# Altium PCB PCB_RC-Car_2024-02-15.pcbdoc
Units mil, origin at the board's own origin, x right, y up, seen from the top; angles counter-clockwise.
Board outline 5135.43 x 2790 mil, 2 copper layers (Top Layer, Bottom Layer); 70 components, 43 nets, 222 pads, 110 vias.
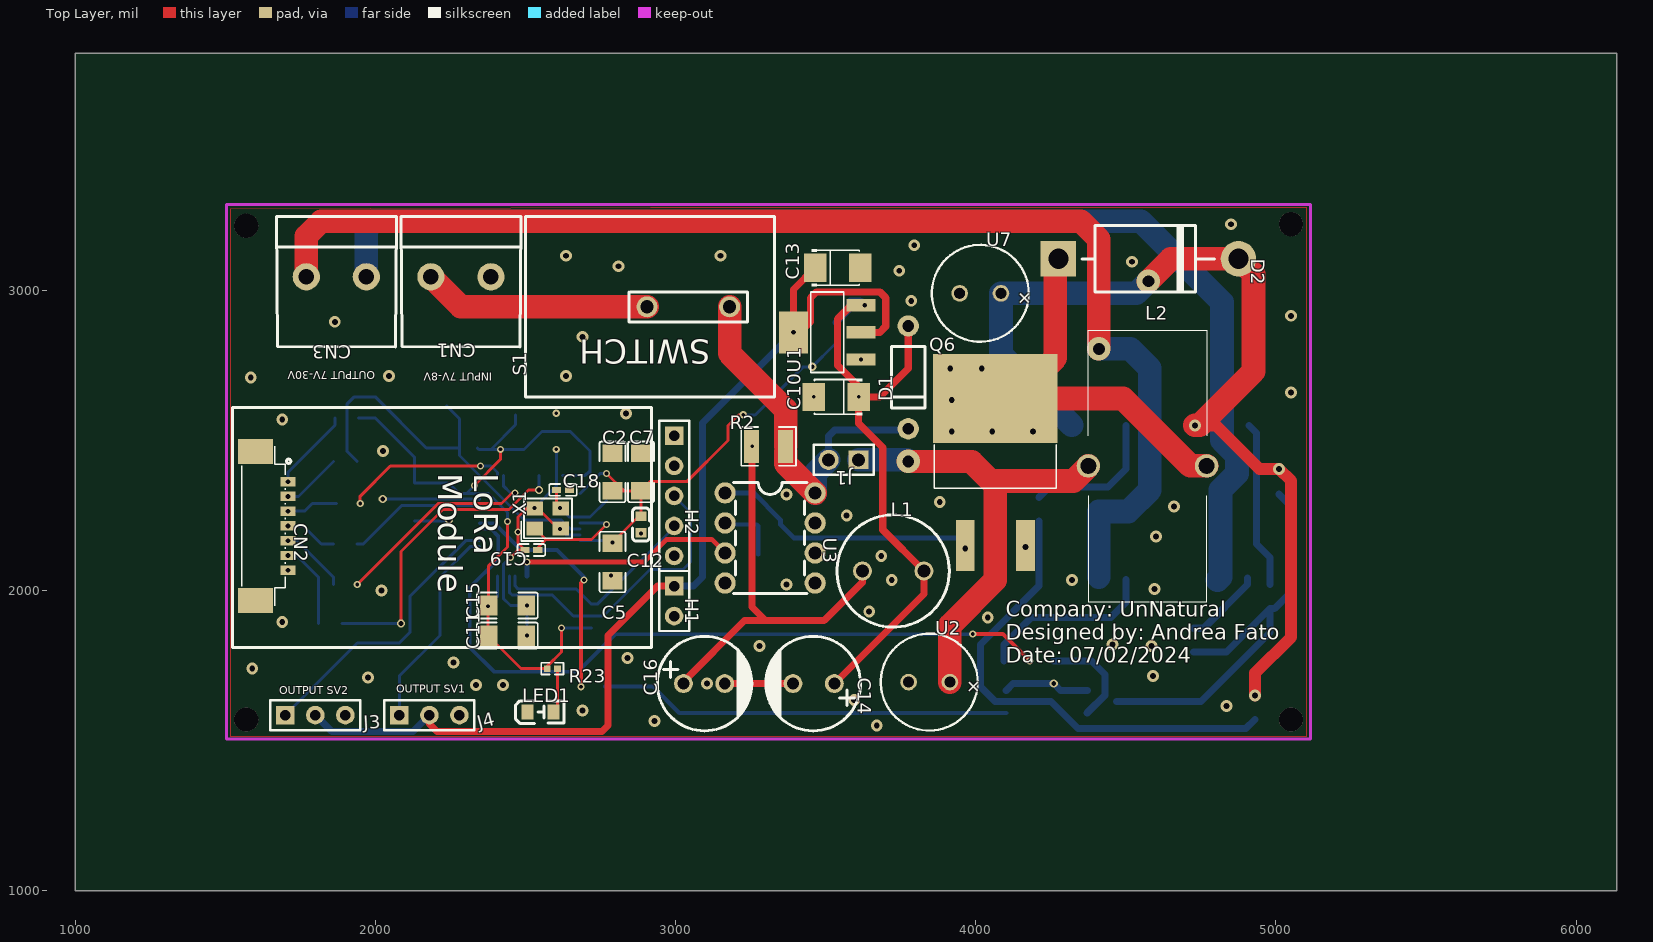
[diagram p0: Top Layer view]
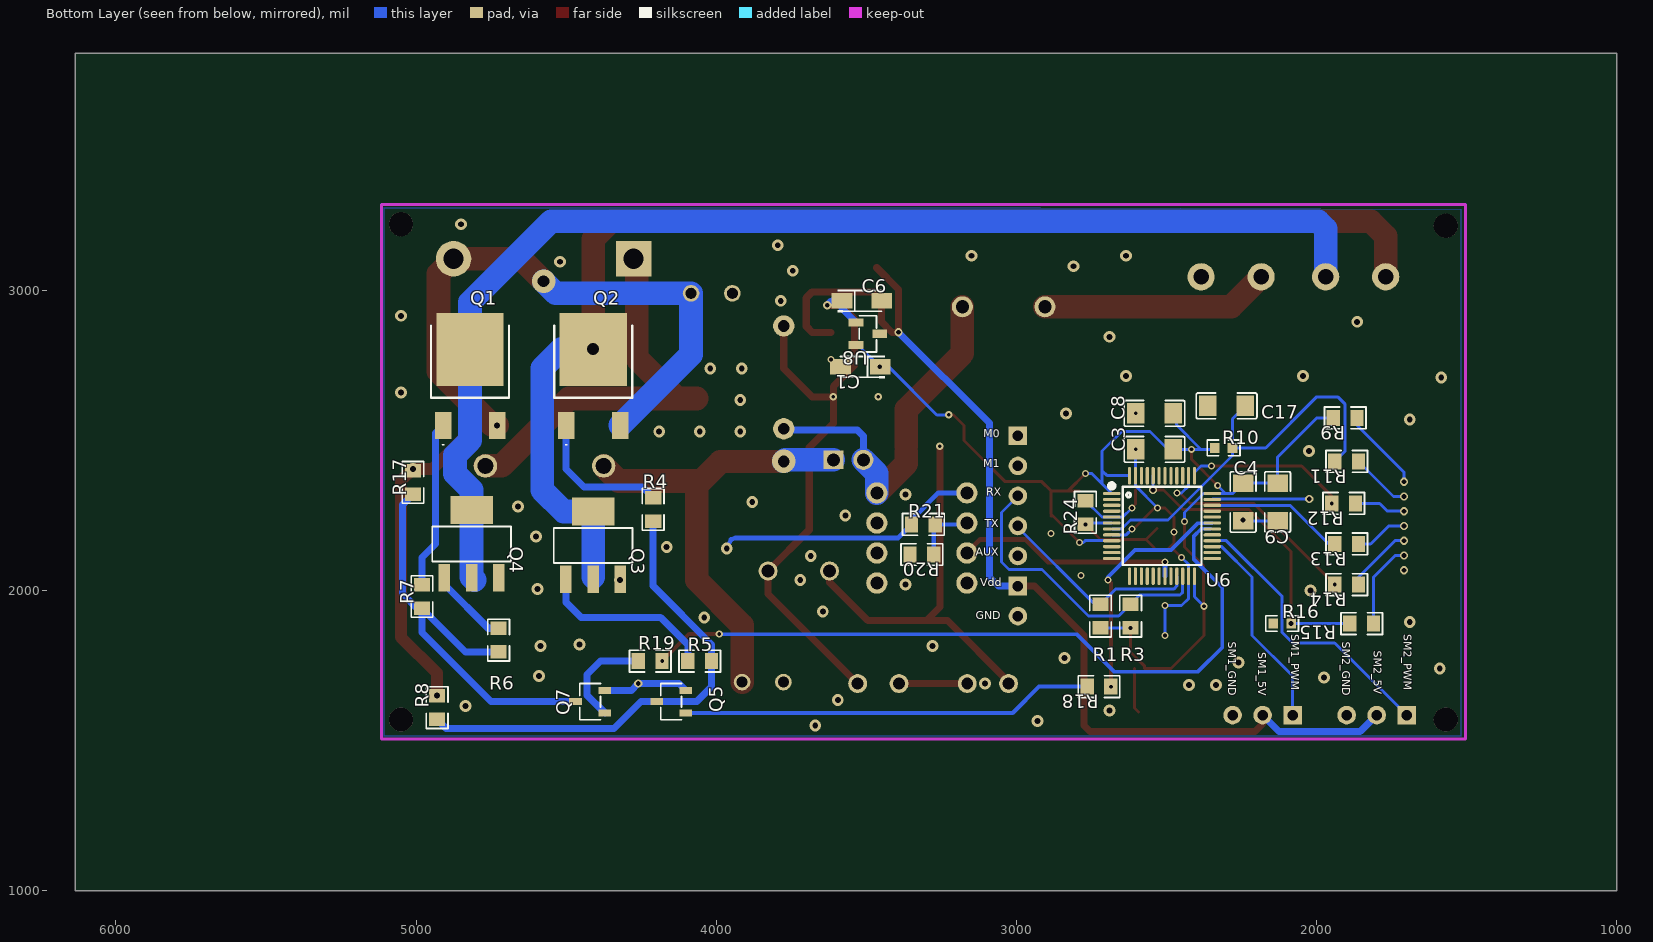
[diagram p1: Bottom Layer view, seen from below]

## Layer stack, top to bottom
Top Layer: signal copper (thickness not stored)
Dielectric: dielectric 12.6, FR-4, Dk 4.8
Bottom Layer: signal copper (thickness not stored)

## Board outline
6135.43,1000 1000,1000 1000,3790 6135.43,3790

## Components (designator, comment, footprint, x,y, rotation, side; value= is the part's Value field where it differs from the comment)
C1 "10uF" CAP-SMD_L3.2-W1.6-RD-C7171 3520,2745 r180 bottom
C2 "100nF" C1206#1 2790,2395 r270 top
C3 "100nF" C1206#2 2540,2470 r0 bottom
C4 "100nF" C1206#2 2245,2295 r270 bottom
C5 "100nF" C1206#1 2790,2095 r90 top
C6 "10uF" CAP-SMD_L3.2-W1.6-RD-C7171 3515,2965 r0 bottom
C7 "4.7uF" C1206#1 2885,2395 r90 top
C8 "4.7uF" C1206#2 2540,2590 r180 bottom
C9 "4.7uF" C1206#2 2130,2295 r90 bottom
C10 "22uF" CAP-SMD_L3.5-W2.8-R-RD 3535,2645 r0 top
C11 "4.7uF" C1206#1 2440,1850 r0 top
C12 "10uF" C0603 2885,2220 r90 top
C13 "22uF" CAP-SMD_L3.5-W2.8-R-RD 3540,3075 r180 top
C14 "470uF" CAP-TH_BD8.0-P3.50-D0.6-FD 3460,1690 r180 top
C15 "100nF" C1206#1 2440,1950 r180 top
C16 "470uF" CAP-TH_BD8.0-P3.50-D0.6-FD 3095,1690 r0 top
C17 "100nF" C1206#2 2300,2615 r0 bottom
C18 "13pF" C0402 2625,2335 r0 top
C19 "13pF" C0402 2520,2135 r0 top
CN1 "1711725" CONN-TH_MKDS3-2-5.08 2285,3045 r180 top
CN2 "53398-0771" CONN-SMD_7P-P1.25_53398-0771 1655,2215 r270 top
CN3 "MKDS3/2-5.08" CONN-TH_MKDS3-2-5.08 1870,3045 r180 top
D1 "1N4005-T" DO-41_BD2.4-L4.7-P8.70-D0.9-RD 3775,2710 r90 top
D2 "SB1240-3G" DO-201AD 4575,3105 r270 top
H1 "HDR-F-2.54_1x2" HDR-F-2.54_1X2 2995,1965 r270 top
H2 "HDR-F-2.54_1x5" HDR-F-2.54_1X5 2995,2315 r270 top
J1 "HDR-M-2.54_1x2" HDR-M-2.54_1X2 3560,2435 r180 top
J3 "HDR-M-2.54_1x3" HDR-M-2.54_1X3 1800,1585 r0 top
J4 "HDR-M-2.54_1x3" HDR-M-2.54_1X3 2180,1585 r0 top
L1 "2.2mH" IND-TH_BD9.5-P5.20-D0.6 3725,2065 r0 top
L2 "2mH" DENO230001 4375,2415 r0 top
LED1 "BL-HGK35A-AV-TRB" LED0805-RD_GREEN 2550,1595 r0 top
Q1 "TSM7P06CP_ROG" TSM7P06CPROG 4820,2715 r0 bottom
Q2 "TSM7P06CP_ROG" TSM7P06CPROG 4410,2715 r0 bottom
Q3 "TSM950N10CW RPG" SOT-223-3_L6.7-W3.7-P2.30-LS7.0-BR 4410,2150 r90 bottom
Q4 "TSM950N10CW RPG" SOT-223-3_L6.7-W3.7-P2.30-LS7.0-BR 4815,2155 r90 bottom
Q5 "NSS40201LT1G" SOT-23-3_L2.9-W1.6-P1.90-LS2.8-BR 4150.01,1630 r0 bottom
Q6 "AUIRF1010ZSTRL" D2PAK_L10.0-W9.0-P2.54-LS15.0-BR 4065,2395 r270 top
Q7 "NSS40201LT1G" SOT-23-3_L2.9-W1.6-P1.90-LS2.8-BR 4420.01,1630 r0 bottom
R1 "4.7k" R0805 2720,1915 r270 bottom
R2 "10Ω" R1210 3310,2480 r180 top
R3 "4.7k" R0805 2620,1915 r270 bottom
R4 "10k" R0805 4210,2270 r270 bottom
R5 "10k" R0805 4055,1765 r180 bottom
R6 "10k" R0805 4725,1835 r90 bottom
R7 "10k" R0805 4980,1980 r90 bottom
R8 "5k" R0805 4930,1610 r270 bottom
R9 "22Ω" R0805 1905,2575 r180 bottom
R10 "100kΩ" R0603 2310,2475 r0 bottom
R11 "22Ω" R0805 1900,2430 r180 bottom
R12 "22Ω" R0805 1910,2290 r180 bottom
R13 "22Ω" R0805 1900,2155 r180 bottom
R14 "22Ω" R0805 1900,2020 r180 bottom
R15 "22Ω" R0805 1850,1890 r180 bottom
R16 "10kΩ" R0603 2115,1890 r0 bottom
R17 "5k" R0805 5010,2360 r270 bottom
R18 "5k" R0805 2725,1680 r180 bottom
R19 "5k" R0805 4220,1765 r0 bottom
R20 "10k" R0805 3315,2120 r0 bottom
R21 "10k" R0805 3310,2220 r180 bottom
R23 "80.6Ω" R0402 2590,1740 r180 top
R24 "1MΩ(DNP)" R0805 2770,2260 r270 bottom
S1 "RA1113112R" SWITCH-2PIN 2855,2945 r180 top
U1 "AZ1117CH-5.0TRG1" SOT-223_L6.5-W3.5-P2.30-LS7.0-BR 3505,2860 r0 top
U2 "100uF" WCAP-PTG5_8X11.5(DXL) 3845,1695 r0 top
U3 "LMC662CN" PDIP-8_L9.3-W6.4-P2.54-LS7.6-BL 3315,2175 r270 top
U6 "STM32F030CCT6" LQFP-48_L7.0-W7.0-P0.50-LS9.0-BL 2515,2215 r90 bottom
U7 "100uF" WCAP-PTG5_8X11.5(DXL) 4015,2990 r0 top
U8 "AP7381-33SA-7" SOT-23-3_L2.9-W1.3-P1.90-LS2.4-BR 3495,2855 r180 bottom
X1 "16MHz" CRYSTAL-SMD_4P-L3.2-W2.5-BL 2575,2240 r0 top

## Footprints (in the part's own frame and the unit in brackets; to place one, negate y for a bottom-side part, rotate by r counter-clockwise, add the part's x,y. Pads: shape width x height; smd on the part's side, far side on the other; paste and mask are expansions set on the pad)
C0402 [mm]
  rect 0.79x0.54 smd paste-100 mask+0.051: 1(-0.545,0) 2(0.545,0)
  silkscreen extent -1.17,-0.5 1.17,0.5
C0603 [mm]
  rect 0.8x0.9 smd paste+0 mask+0.051: 1(-0.7,0) 2(0.7,0)
  silkscreen extent -1.41,-0.71 1.39,0.72
C1206#1 [mm]
  rect 1.485x1.728 smd paste-100 mask+0.051: 1(-1.593,0) 2(1.593,0)
  silkscreen extent -2.56,-1.09 2.56,1.09
C1206#2 [mm]
  rect 1.485x1.728 smd paste-100 mask+0.051: 1(1.593,0) 2(-1.593,0)
  silkscreen extent -2.56,-1.09 2.56,1.09
CAP-SMD_L3.2-W1.6-RD-C7171 [mil]
  rect 69.19x51.02 smd paste+0 mask+2: 1(66.39,0) 2(-66.39,0)
  silkscreen extent -66,-37 81,37
CAP-SMD_L3.5-W2.8-R-RD [mm]
  rect 1.9x2.376 smd paste+0 mask+0.051: 1(1.899,0) 2(-1.899,0)
  silkscreen extent -1.83,-1.55 2.21,1.55
CAP-TH_BD8.0-P3.50-D0.6-FD [mm]
  round 1.6 hole 1 paste+0 mask+0.051: 1(-1.75,0) 2(1.75,0)
  silkscreen extent -3.96,-4 4.04,4
CONN-SMD_7P-P1.25_53398-0771 [mm]
  rect 0.8x1.3 smd paste+0 mask+0.051: 1(-3.75,1.375) 2(-2.5,1.375) 3(-1.25,1.375) 4(0,1.375) 5(1.25,1.375) 6(2.5,1.375) 7(3.75,1.375)
  rect 2.1x3 smd paste+0 mask+0.051: 8(6.3,-1.375) 9(-6.3,-1.375)
  silkscreen extent -6.73,-2.54 6.73,1.61
CONN-TH_MKDS3-2-5.08 [mm]
  round 2.3 hole 1.3 paste+0 mask+0.051: 1(-2.54,0) 2(2.54,0)
  silkscreen extent -5.08,-5.08 5.08,5.96
CRYSTAL-SMD_4P-L3.2-W2.5-BL [mm]
  rect 1.4x1.2 smd paste+0 mask+0.051: 1(-1.1,-0.85) 2(1.1,-0.85) 3(1.1,0.85) 4(-1.1,0.85)
  silkscreen extent -2.26,-1.91 2.03,1.68
D2PAK_L10.0-W9.0-P2.54-LS15.0-BR [mm]
  rect 4.3x1.6 smd paste+0 mask+0.051: 1(6.218,-2.54) 3(6.218,2.54)
  rect 7.532x10.566 smd paste+0 mask+0.051: 2(-6.218,0)
  silkscreen extent -2.3,-5.16 1.37,5.16
DENO230001 [mil]
  round 77.95 hole 51.96 paste+0 mask+2: 1(0,0) 2(393.7,0)
  silkscreen extent 0,-453 394,453
DO-41_BD2.4-L4.7-P8.70-D0.9-RD [mm]
  round 1.8 hole 1 paste+0 mask+0.051: 1(-4.35,0) 2(4.35,0)
  silkscreen extent -2.6,-1.4 2.6,1.4
DO-201AD [mm]
  rect 3x3 hole 1.7 paste+0 mask+0.051: 1(0,-7.62)
  round 3 hole 1.7 paste+0 mask+0.051: 2(0,7.62)
  silkscreen extent -2.8,-5.6 2.8,5.6
HDR-F-2.54_1X2 [mil]
  rect 62x62 hole 35 paste+0 mask+2: 1(-50,0)
  round 62 hole 35 paste+0 mask+2: 2(50,0)
  silkscreen extent -100,-49 100,50
HDR-F-2.54_1X5 [mil]
  rect 62x62 hole 35 paste+0 mask+2: 1(-200,0)
  round 62 hole 35 paste+0 mask+2: 2(-100,0) 3(0,0) 4(100,0) 5(200,0)
  silkscreen extent -250,-50 250,50
HDR-M-2.54_1X2 [mm]
  rect 1.7x1.575 hole 1.1 paste+0 mask+0.051: 1(-1.27,0)
  round 1.7 hole 1.1 paste+0 mask+0.051: 2(1.27,0)
  silkscreen extent -2.54,-1.27 2.54,1.27
HDR-M-2.54_1X3 [mil]
  rect 62x62 hole 35 paste+0 mask+2: 1(-100,0)
  round 62 hole 35 paste+0 mask+2: 2(0,0) 3(100,0)
  silkscreen extent -150,-50 150,50
IND-TH_BD9.5-P5.20-D0.6 [mm]
  round 1.6 hole 1.1 paste+0 mask+0.051: 1(-2.6,0) 2(2.6,0)
  silkscreen extent -4.75,-4.75 4.75,4.75
LED0805-RD_GREEN [mm]
  rect 1x1.25 smd paste+0 mask+0.051: 1(-1.1,0) 2(1.1,0)
  silkscreen extent -2.1,-0.95 1.98,0.96
LQFP-48_L7.0-W7.0-P0.50-LS9.0-BL [mm]
  oval 0.27x1.5 smd paste+0 mask+0.05: 1(2.75,4.25) 2(2.25,4.25) 3(1.75,4.25) 4(1.25,4.25) 5(0.75,4.25) 6(0.25,4.25) 7(-0.25,4.25) 8(-0.75,4.25) 9(-1.25,4.25) 10(-1.75,4.25) 11(-2.25,4.25) 12(-2.75,4.25) 25(-2.75,-4.25) 26(-2.25,-4.25) 27(-1.75,-4.25) 28(-1.25,-4.25) 29(-0.75,-4.25) 30(-0.25,-4.25) 31(0.25,-4.25) 32(0.75,-4.25) 33(1.25,-4.25) 34(1.75,-4.25) 35(2.25,-4.25) 36(2.75,-4.25)
  oval 1.5x0.27 smd paste+0 mask+0.05: 13(-4.25,2.75) 14(-4.25,2.25) 15(-4.25,1.75) 16(-4.25,1.25) 17(-4.25,0.75) 18(-4.25,0.25) 19(-4.25,-0.25) 20(-4.25,-0.75) 21(-4.25,-1.25) 22(-4.25,-1.75) 23(-4.25,-2.25) 24(-4.25,-2.75) 37(4.25,-2.75) 38(4.25,-2.25) 39(4.25,-1.75) 40(4.25,-1.25) 41(4.25,-0.75) 42(4.25,-0.25) 43(4.25,0.25) 44(4.25,0.75) 45(4.25,1.25) 46(4.25,1.75) 47(4.25,2.25) 48(4.25,2.75)
  silkscreen extent -3.3,-3.34 3.59,4.46
PDIP-8_L9.3-W6.4-P2.54-LS7.6-BL [mm]
  round 1.8 hole 1.1 paste+0 mask+0.051: 1(-3.81,-3.81) 2(-1.27,-3.81) 3(1.27,-3.81) 4(3.81,-3.81) 5(3.81,3.81) 6(1.27,3.81) 7(-1.27,3.81) 8(-3.81,3.81)
  silkscreen extent -4.7,-3.11 4.7,3.11
R0402 [mm]
  rect 0.566x0.54 smd paste-100 mask+0.051: 1(-0.433,0) 2(0.433,0)
  silkscreen extent -0.94,-0.5 0.94,0.5
R0603 [mil]
  rect 31.75x34.02 smd paste-3937.01 mask+2: 1(29.66,0) 2(-29.66,0)
  silkscreen extent -55,-26 55,26
R0805 [mil]
  rect 44.59x54.21 smd paste-3937.01 mask+2: 1(39.37,0) 2(-39.37,0)
  silkscreen extent -69,-36 69,36
R1210 [mil]
  rect 50.49x110.55 smd paste-3937.01 mask+2: 1(-56.74,0) 2(56.74,0)
  silkscreen extent -91,-64 91,64
SOT-23-3_L2.9-W1.3-P1.90-LS2.4-BR [mm]
  rect 1.25x0.7 smd paste+0 mask+0.051: 1(-1,0.95) 2(-1,-0.95) 3(1,0)
  silkscreen extent -0.73,-1.53 0.73,1.53
SOT-23-3_L2.9-W1.6-P1.90-LS2.8-BR [mm]
  rect 1.07x0.6 smd paste+0 mask+0.051: 1(-1.235,0.95) 2(-1.235,-0.95) 3(1.235,0)
  silkscreen extent -0.88,-1.54 0.88,1.54
SOT-223-3_L6.7-W3.7-P2.30-LS7.0-BR [mm]
  rect 2.34x0.98 smd paste+0 mask+0.051: 1(-2.87,2.3) 2(-2.87,0) 3(-2.87,-2.3)
  rect 2.34x3.6 smd paste+0 mask+0.051: 4(2.87,0)
  silkscreen extent -1.47,-3.33 1.47,3.33
SOT-223_L6.5-W3.5-P2.30-LS7.0-BR [mm]
  rect 2.465x1.05 smd paste+0 mask+0.051: 1(2.857,-2.3) 2(2.857,0) 3(2.857,2.3)
  rect 2.465x3.54 smd paste+0 mask+0.051: 4(-2.857,0)
  silkscreen extent -1.4,-3.4 1.4,3.4
SWITCH-2PIN [mil]
  round 70 hole 44 paste+0 mask+2: 1(-50,0) 2(-325,0)
  silkscreen extent -475,-300 355,300
TSM7P06CPROG [mm]
  rect 1.4x2.29 smd paste+0 mask+0.051: 1(2.285,4.19) 3(-2.285,4.19)
  rect 5.69x6.18 smd paste+0 mask+0.051: 2(0,-2.245)
  silkscreen extent -3.3,-4.23 3.3,5.88
WCAP-PTG5_8X11.5(DXL) [mil]
  round 55.43 hole 35.44 slot 35.45 at 0 deg paste+0 mask+2: 1(68.9,0) 2(-68.9,0)
  silkscreen extent -161,-161 161,161

## Free pads (board coordinates)
  round 80 hole 80 unplated paste+0: ""(1570,1570) ""(1570,3215) ""(5050,1570) ""(5050,3220)

## Via types
v1: diameter 39.37, hole 19.69, Top Layer to Bottom Layer, tented both sides, 59 vias
v2: diameter 24.41, hole 12.2, Top Layer to Bottom Layer, tented both sides, 33 vias
v3: diameter 27.56, hole 15.75, Top Layer to Bottom Layer, tented both sides, 15 vias
v4: diameter 78.74, hole 39.37, Top Layer to Bottom Layer, tented both sides, 3 vias

## Nets (pads, with @x,y where several pads share a name; then routed paths per layer and width w, separated by ;. In a path a pad name is that pad's centre, name@x,y a point inside that pad or via, vN(x,y) a via of type N, cw(c..) or ccw(c..) an arc to the next point about the centre after c; other vN are vias at no path point)
3.3V: C1.1 C2.2 C3.2 C4.2 C5.2 C7.1 C8.1 C9.1 C11.1 C12.2 C15.2 R1.1 R3.1 R9.2 R10.1 R23.2 U6.1 U6.9 U6.24 U6.36 U6.48 U8.2 | length 4372.1
  Top Layer w10: v2(2330,2350) 2417.1,2437.1 v2(2417.11,2470) ; v2(2440,2230) 2440,2145 2377.3,2082.3 C15.2 v2(2375,1947.7) 2375,1850 2485,1740 R23.2 2572.96,1747.96 2620,1795 v2(2620,1875) ; v2(2770,2390) 2827.7,2332.3 2835.13,2332.3 ; v2(2790,2160) 2885,2255 C7.1 ; C12.2@2879.86,2247.56 C12.2 ; v2(3225,2585) 3210,2585 3175,2550 3175,2500 3037.7,2362.7 2915.4,2362.7 C7.1 ; C7.1 C2.2 C7.1
  Bottom Layer w10: R9.2 2000,2575 2130,2445 C9.1 C4.2 2279.43,2323.27 U6.36 2376.73,2323.27 2440,2260 v2(2440,2230) ; 2296.31,2323.27 2303.27,2323.27 v2(2330,2350) ; R10.1 2344.66,2470 v2(2417.11,2470) C3.2 2495,2470 2555,2530 2649.6,2530 2715,2464.6 2715,2356 U6.1 2749,2390 v2(2770,2390) ; v2(2375,1947.7) 2406.73,1979.43 U6.24 ; 2385,2470 2467.2,2552.2 C8.1@2467.2,2585 ; v2(2620,1875) 2719.37,1875 R1.1 ; U6.48 2697.3,2382.3 2715,2400 2715,2412.5 ; U6.9 2770.8,2165.8 2776.6,2160 v2(2790,2160) ; v2(3225,2585) 3265,2585 3425,2745 v3(3455,2745) 3527.6,2817.6 U8.2
+5V: C13.1 H1.1 J3.2 J4.2 U1.2 U1.4 | length 3554.8
  Top Layer w23.62: J4.2 2180,1555 2205,1530 2755,1530 2775,1550 2775,1850 2940,2015 H1.1 ; C13.1@3465.25,3075 3392.5,3002.25 v3(3392.5,2860) 3415,2860 3450,2895 3450,2975 3470,2995 3680,2995 3700,2975 3700,2880 3680,2860 U1.2
  Bottom Layer w23.62: J3.2 1855,1530 2125,1530 J4.2 ; H1.1 3060,2015 3090,2045 3090,2557.5 v3(3392.5,2860)
BLTX: R14.2 U6.38 | length 734
  Top Layer w10: v2(1939.37,2020) 2209.4,2290 2420,2290 2455,2325 v2(2465,2325)
  Bottom Layer w10: U6.38 2426.4,2348.6 2450,2325 v2(2465,2325)
BOOT0: R15.2 R16.2 U6.44 | length 1028.3
  Top Layer w10: v3(2085.34,1890) 2085.3,2130.3 2225,2270 2445,2270 2510,2335 v3(2545,2335)
  Bottom Layer w10: R15.2 v3(2085.34,1890) ; U6.44 2544.53,2335.47 v3(2545,2335)
C6_1: C6.1 C10.1 C14.1 D1.2 L1.2 U1.3 U8.1 | length 2059
  Top Layer w23.62: C14.1 3827.36,1988.46 L1.2 ; v3(3630,2950) 3585,2950 3540,2905 3540,2750 3609.8,2680.2 v2(3609.8,2645) ; D1.2 3775,2740 3680,2645 v2(3609.8,2645) ; L1.2 3690,2202.4 3690,2476.9 3609.8,2557.1 v2(3609.8,2645)
  Bottom Layer w23.62: U8.1 3581.39,2939.42 C6.1 3615,2965 v3(3630,2950)
CN1_2: CN1.2 S1.1 | length 761.4
  Top Layer w78.74: CN1.2 2285,2945 S1.1
CN2_1: CN2.1 R9.1 | length 277.2
  Bottom Layer w10: v3(1709.14,2362.64) 1709.1,2394.1 1865.63,2550.63 R9.1
CN2_2: CN2.2 R11.1 | length 199.8
  Bottom Layer w10: v3(1709.13,2313.43) 1744.1,2313.4 R11.1
CN2_3: CN2.3 R12.1 | length 172.2
  Bottom Layer w10: v3(1709.13,2264.21) 1764.2,2264.2 1790,2290 R12.1
CN2_4: CN2.4 R13.1 | length 176.4
  Bottom Layer w10: v3(1709.13,2215) 1760,2215 1820,2155 R13.1
CN2_5: CN2.5 R14.1 | length 226.2
  Bottom Layer w10: v3(1709.13,2165.79) 1739.2,2165.8 1860.6,2044.4 R14.1
CN2_6: CN2.6 R15.1 | length 285.8
  Bottom Layer w10: v3(1709.13,2116.58) 1738.4,2116.6 1810.6,2044.4 R15.1
GND: C1.2 C2.1 C3.1 C4.1 C5.1 C6.2 C7.2 C8.2 C9.2 C10.2 C11.2 C12.1 C13.2 C14.2 C15.1 C16.2 C17.1 C18.2 C19.1 CN1.1 CN2.7 H1.2 H2.1 H2.2 J3.3 J4.3 LED1.1 Q3.3 Q4.3 Q5.2 Q6.3 Q7.2 R16.1 R20.1 U1.1 U2.2 U3.4 U6.8 U6.23 U6.35 U6.47 U7.2 U8.3 X1.2 X1.4 | length 1956.2
  Top Layer w10: v2(2450,2110) 2475,2135 C19.1 2475,2158.54 v2(2475,2195) 2475,2245 2505,2275 v2(2530,2275) 2540,2275 2608.5,2206.5 X1.2
  Top Layer w23.62: C16.2 C14.2
  Bottom Layer w10: v3(2025,2305) 2346.26,2305 U6.35 ; C9.2 2242.3,2232.3 v3(2245,2235) C4.1 ; v2(2450,2110) 2426.4,2086.4 U6.23 2426.4,1973.6 2450,1950 v2(2505,1950) v2(2505,1850) ; v2(2530,2275) 2603.58,2348.58 U6.47 v2(2602.7,2470) ; v2(2615,2205) 2634.5,2185.5 U6.8
  Bottom Layer w23.62: Q5.2 4123.98,1690 v3(4260,1690) 4282.6,1667.4 Q7.2
  other v1: 3670,1550 2930,1565 2690,1600 4835,1615 3595,1635 2335,1685 2425,1685 3105,1690 1975,1710 4590,1715 1590,1740 2260,1760 2840,1775 3280,1815 4585,1815 4455,1820 1690,1895 4040,1910 3645,1930 2020,2000 4595,2005 3370,2020 3720,2035 4320,2035 3685,2115 4165,2145 4600,2180 3570,2250 4660,2280 3880,2295 3370,2320 2025,2465 1690,2570 2835,2590 5050,2660 1585,2710 2045,2715 2635,2715 2690,2845 1865,2895 5050,2915 3785,2965 3745,3065 2810,3080 4520,3095 2635,3115 3150,3115 3795,3150 4850,3220
  other v2: 2785,2050 2885,2190 2602.7,2590 3460.25,2645 3617.5,2769.45
  other v3: 1709.13,2067.36
L2_1: J1.1 L2.1 U2.1 | length 1643.1
  Top Layer w78.74: v4(3775,2430) 3986.3,2428.7 ; U2.1 3913.9,1883.9 4065,2035 4065,2350 3986.3,2428.7 ; L2.1 4325,2365 4050,2365 3986.3,2428.7
  Bottom Layer w78.74: J1.1 3770,2435 v4(3775,2430)
L2_2: D2.1 L2.2 Q6.2 | length 1387
  Top Layer w78.74: D2.1 4265,3095 4265,2775 4129.8,2639.8 Q6.2 4490.2,2639.8 4715,2415 L2.2
  other v1: 3920,2530 4055,2530 4190,2530 3920,2635 3915,2740 4020,2740
LORA_RX: H2.3 R3.2 U6.22 | length 1007.7
  Bottom Layer w10: U6.22 2446.1,1993.9 2455,1985 2589.4,1985 R3.2 2659.4,1915 2760,1915 2915,2070 3025,2070 3050,2095 3050,2260 H2.3
LORA_TX: H2.4 R1.2 U6.21 | length 697.9
  Bottom Layer w10: U6.21 2465.8,2015.8 2475,2005 2669.4,2005 R1.2 2739.4,1954.4 2995,2210 H2.4
M+: CN3.2 Q2.2 Q3.2 Q3.4 | length 4205.3
  Top Layer w78.74: CN3.2 1770,3180 1820,3230 4350,3230 4410,3170 v4(4410,2805)
  Bottom Layer w78.74: Q3.2@4410,2045 Q3.4 4508,2263 4580,2335 4580,2740 4515,2805 v4(4410,2805)
M-: CN3.1 Q1.2 Q4.2 Q4.4 | length 4104.8
  Bottom Layer w78.74: CN3.1 1970,3205 1995,3230 4550,3230 4820,2960 Q1.2 4820,2500 4870,2450 4870,2390 4815,2335 Q4.4 4815,2045 Q4.2@4805,2035
M_BACKWARD: R19.2 U6.30 | length 2469.3
  Top Layer w13.78: v2(3990,1855) 4090,1855 v2(4180,1765)
  Bottom Layer w11.81: U6.30@2352.7,2205.2 2384.8,2205.2 2410,2180 2410,2105 2315,2010 2315,1810 2395,1730 2675,1730 2800,1855 v2@3995,1855
M_FORWARD: R18.1 U6.31 | length 790.9
  Top Layer w11.81: v2(2685,1680) 2685,2025 v2(2695,2035)
  Bottom Layer w11.81: U6.31 2395.2,2224.8 2485,2135 2605,2135 2695,2045 v2(2695,2035)
M_SPEED: U3.3 U6.19 | length 757.1
  Top Layer w15.75: v2(2505,2095) 2894.9,2095 2969.9,2170 3120,2170 U3.3
  Bottom Layer w15.75: v2(2505,2095) 2505,2047.84 U6.19
NRST: C17.2 R10.2 R11.2 U6.7 | length 1346.8
  Bottom Layer w10: R11.2 1905,2464.4 1905,2620 1930,2645 2000,2645 2170,2475 R10.2 2280.34,2571.96 C17.2 ; R10.2 2280.3,2449.7 2495,2235 2620,2235 2649.8,2205.2 U6.7
OSC-IN: C18.1 R24.2 U6.5 X1.3 | length 258
  Top Layer w10: C18.1 2603.54,2288.24 X1.3
  Bottom Layer w10: v2(2615,2275) 2645.47,2244.53 U6.5 2715.16,2244.53 R24.2
OSC-OUT: C19.2 R24.1 U6.6 X1.1 | length 410.7
  Top Layer w10: X1.1 2568.2,2170 2541.46,2143.26 C19.2 ; 2568,2170 2720,2170 v2(2770,2220)
  Bottom Layer w10: U6.6 2765.16,2224.84 v2(2770,2220) R24.1
Q1_1: Q1.1 R7.1 | length 559.7
  Bottom Layer w23.62: Q1.1 4935,2525 4935,2155 4980,2110 R7.1
Q2_1: Q2.1 R4.2 | length 474.6
  Bottom Layer w23.62: R4.2 4245.6,2345 4440,2345 4500,2405 Q2.1
Q3_1: Q3.1 R5.2 | length 595.2
  Bottom Layer w23.62: R5.2 4094.37,1819.37 4185,1910 4449.5,1910 4500.55,1961.05 Q3.1
Q4_1: Q4.1 R6.1 | length 262.5
  Bottom Layer w23.62: R6.1 4759.4,1874.4 4905.55,2020.55 Q4.1
Q5_1: Q5.1 R18.2 | length 1373.2
  Bottom Layer w13.78: R18.2 2925,1680 3012.4,1592.6 Q5.1
Q5_3: Q5.3 R4.1 R5.1 R8.1 | length 1616.5
  Bottom Layer w23.62: R4.1 4210,2015 4015.63,1820.63 R5.1 4015.63,1679.37 4065,1630 Q5.3 4250,1630 4340,1540 4899.4,1540 R8.1
Q6_1: Q6.1 R21.2 U3.1 | length 890.9
  Bottom Layer w15.75: U3.1 3260,2325 3349.4,2235.6 R21.2 3394.4,2175 3935.9,2175 3950.8,2169.7 v1(3965,2140)
Q7_1: Q7.1 R19.1 | length 340.9
  Bottom Layer w23.62: R19.1 4385,1765 4430,1720 4430,1651.2 Q7.1
Q7_3: Q7.3 R6.2 R7.2 R17.1 | length 1432.9
  Bottom Layer w23.62: Q7.3 4750,1630 4980,1860 R7.2 4995.6,1940.6 5045,1990 5045,2285.6 R17.1 ; R6.2 4835,1795.63 R7.2
R2_2: C16.1 L1.1 R2.2 | length 1375.9
  Top Layer w23.62: C16.1 3026.1,1696.1 3230,1900 3495,1900 3622.6,2027.6 L1.1 ; v2(3255,2480) 3255,1944.83 3299.83,1900
R23_1: LED1.2 R23.1 | length 150.7
  Top Layer w10: LED1.2 2607.04,1608.73 R23.1
SM1_PWM: J4.1 U6.27 | length 690.5
  Bottom Layer w10: J4.1 2080,1715 2215,1850 2215,2045 2316.1,2146.1 U6.27
SM2_PWM: J3.1 U6.28 | length 958.6
  Bottom Layer w10: J3.1 1940,1825 2080,1825 2115,1860 2115,1980 2300.8,2165.8 U6.28
SWCLK: R12.2 U6.37 | length 543.4
  Top Layer w10: v2(1949.37,2290) 1949.37,2314.37 2050,2415 v2(2350,2415)
  Bottom Layer w10: v2(2350,2415) 2385,2415 2406.73,2393.27 U6.37
SWDIO: R13.2 U6.34 | length 461.7
  Bottom Layer w10: R13.2 1960,2155 2088.9,2283.9 U6.34
U3_2: R20.2 R21.1 U3.2 | length 209.8
  Bottom Layer w13.78: U3.2 3170,2220 R21.1 3275.63,2215 R20.2
VBAT: D1.1 J1.2 R2.1 S1.2 U3.8 | length 1203.6
  Top Layer w78.74: S1.2 3180,2790 3366.74,2603.26 R2.1 ; R2.1@3366.74,2462.1 3366.74,2423.26 U3.8
  Bottom Layer w23.62: J1.2 3510,2515 3530,2535 3771.26,2535 D1.1
  Bottom Layer w78.74: U3.8 3465,2390 J1.2
VBAT+: D2.2 Q1.3 Q2.3 R8.2 R17.2 U7.1 | length 3203.1
  Top Layer w39.37: v1(4730,2550) 4800,2550 4945,2405 v1(5010,2405) 5050,2365 5050,1845 4930,1725 v1(4930,1650)
  Top Layer w78.74: v4(4575,3030) 4650,3105 D2.2 4925,3055 4925,2730 4745,2550 v1(4730,2550)
  Bottom Layer w78.74: Q2.3 4083.9,2786.18 U7.1 4535,2990 v4(4575,3030)
pads on no net: CN2.8 CN2.9 H2.5 U3.5 U3.6 U3.7 U6.2 U6.3 U6.4 U6.10 U6.11 U6.12 U6.13 U6.14 U6.15 U6.16 U6.17 U6.18 U6.20 U6.25 U6.26 U6.29 U6.32 U6.33 U6.39 U6.40 U6.41 U6.42 U6.43 U6.45 U6.46

## Polygon pours and split planes (outlines as drawn)
GND on Bottom Layer (solid): 1520,3270 1520,1515 5105,1515 5105,3275 2985,3275 2920,3275
GND on Top Layer (solid): 1517.5,3270 1517.5,1515 5102.5,1515 5102.5,3275 2982.5,3275 2917.5,3275

## Silkscreen, mask and mechanical layers (free items; w line width, h text height)
Top Overlay:
  lines w10: 1525,1810 2920,1810 2920,2610 1525,2610 1525,1810
  text "OUTPUT 7V-30V" at 2000,2740 h45 r180
  text "INPUT 7V-8V" at 2390,2735 h45 r180
  text "LoRa / Module" at 2210,2390 h80 r270
  text "Company: UnNatural / Designed by: Andrea Fato / Date: 07/02/2024" at 4100,1759.41 h51.18
  text "OUTPUT SV1" at 2070,1650 h45
  text "OUTPUT SV2" at 1680,1645 h45
Bottom Overlay:
  text "M0" at 3110,2500 h45 r1
  text "M1" at 3110,2400 h45
  text "RX" at 3100,2305 h45
  text "TX" at 3105,2200 h45
  text "AUX" at 3135,2105 h45
  text "Vdd" at 3120,2005 h45
  text "GND" at 3135,1895 h45
  text "SM2_PWM" at 1720,1855 h45 r90
  text "SM1_PWM" at 2095,1855 h45 r90
  text "SM2_GND" at 1925,1830 h45 r90
  text "SM1_GND" at 2305,1830 h45 r90
  text "SM2_5V" at 1820,1800 h45 r90
  text "SM1_5V" at 2205,1795 h45 r90

## Text inside footprints (layer, text, board x,y; h text height)
S1: Top Overlay "SWITCH" at 3115,2835 h80 r180
U2: Top Overlay "+" at 3997.73,1714.06 h50 r225; Document "+" at 3997.73,1714.06 h50 r225
U7: Top Overlay "+" at 4167.73,3009.06 h50 r225; Document "+" at 4167.73,3009.06 h50 r225